# EAGLE board rpd_pcb (EAGLE 9.7.0)
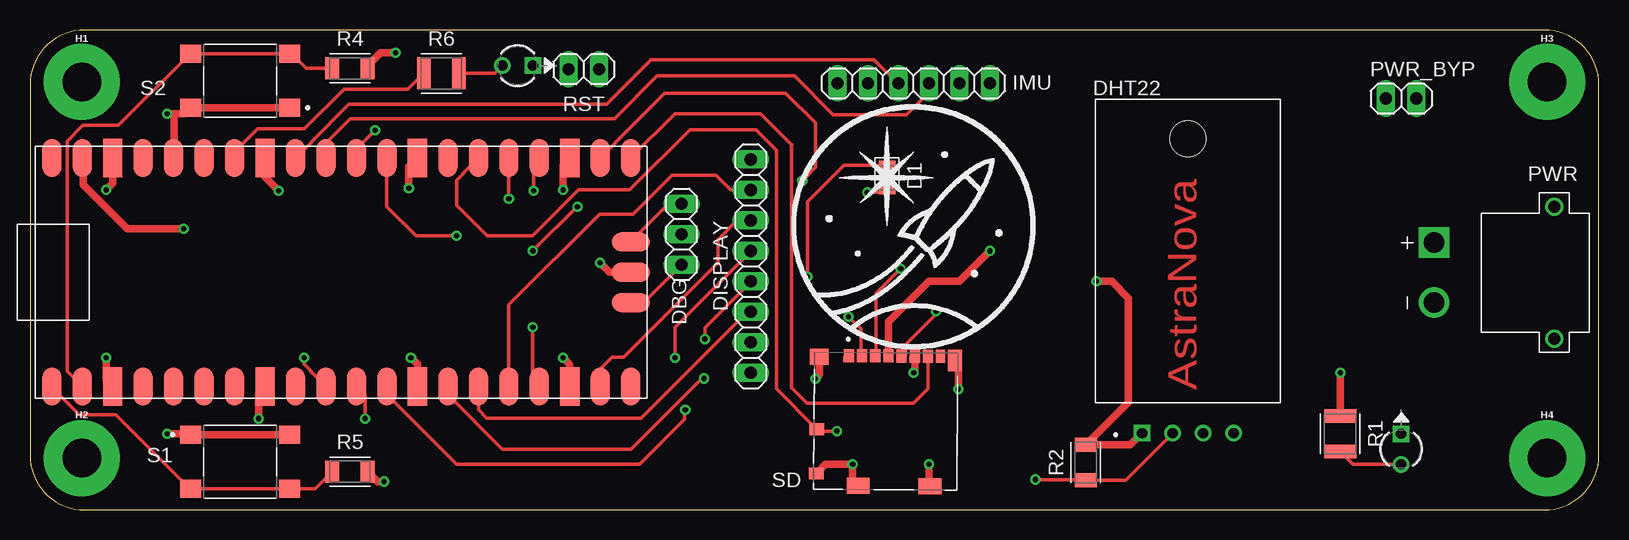
[diagram p0: board, top side]
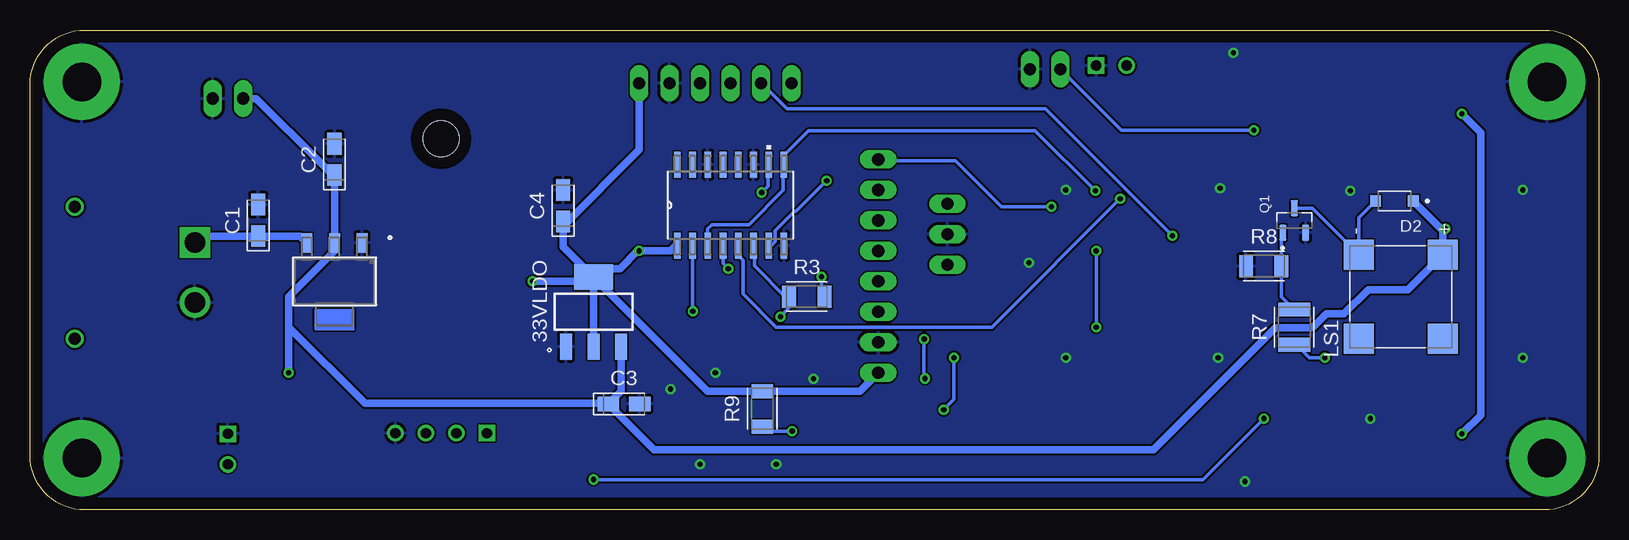
[diagram p1: board, bottom side, seen from below]

Size 130.79 x 40 mm. Coordinates in mm from the lower left corner, seen from the top.
Outline: 130.79,4.57 130.79,35.43 arc90 126.22,40 4.57,40 arc90 0,35.43 0,4.57 arc90 4.57,0 126.22,0 arc90 130.79,4.57
Copper layers (1*16): Top 0.035mm / dielectric 1.5mm / Bottom 0.035mm
Design rules "default.dru": minimum track width 12mil, minimum drill 17mil, track to track 6mil, track to pad 12mil, pad to pad 12mil, via to via 12mil, smd to smd 12mil, copper to edge 40mil, drill to drill 15mil, minimum pad ring 10mil, minimum via ring 8mil, stop-mask expansion 4mil, vias tented up to drill 9999mil, thermal gap 10mil
Net classes: 1 Power: width 0.635 mm

## Footprints (pad centres in the part's own frame; a part is rotated, then mirrored left to right if it is on the bottom)
SOT-223_STM = smd 0.914 x 1.6: 1 -2.3,-3.2; 2 0,-3.2; 3 2.3,-3.2
SOT230P700X180-4N = smd 2.15 x 1: 1 -2.9,2.3; 2 -2.9,0; 3 -2.9,-2.3 | smd 2.15 x 3.25: 4 2.9,0
CAPMP3216X180N = smd 1.796 x 1.189: 1 -1.31,0; 2 1.31,0
TLL_SERIES_VIS = drill 0.864 pad 1.372 square: 1 0,0 | drill 0.864 pad 1.372: 2 2.54,0
LEDC2012X110N_FLAT-R = smd 0.762 x 1.362: A 1.025,0; C -1.025,0
DIO_SD101BW_RH = smd 0.9 x 0.95: A 1.575,0; C -1.575,0
1X03 = drill 1.016 long: 1 -2.54,0; 2 0,0; 3 2.54,0
XDCR_DHT22 = drill 0.86 pad 1.29 square: 1 -3.81,-15.19 | drill 0.86 pad 1.29: 2 -1.27,-15.19; 3 1.27,-15.19; 4 3.81,-15.19 | hole 3: 0,9.35
1X08 = drill 1.016 long: 1 -8.89,0; 2 -6.35,0; 3 -3.81,0; 4 -1.27,0; 5 1.27,0; 6 3.81,0; 7 6.35,0; 8 8.89,0
STANDOFF-ELECTRICAL = drill 3.2 pad 6.35: P1 0,0
1X06 = drill 1.016 long: 1 -6.35,0; 2 -3.81,0; 3 -1.27,0; 4 1.27,0; 5 3.81,0; 6 6.35,0
CUI_CMT-8540S-SMT = smd 2.5 x 2.5: 1 -3.5,3.5; 2 -3.5,-3.5; N 3.5,3.5; P 3.5,-3.5
RPI_PICO = smd 3.2 x 1.6: 3V3 9.525,13.97; 3V3_EN 9.525,16.51; ADC_VREF 9.525,11.43; AGND 9.525,6.35; GND@1 -9.525,19.05; GND@2 -9.525,6.35; GND@3 -9.525,-6.35; GND@4 -9.525,-19.05; GND@6 9.525,-19.05; GND@7 9.525,-6.35; GND@8 9.525,19.05; GP0 -9.525,24.13; GP1 -9.525,21.59; GP2 -9.525,16.51; GP3 -9.525,13.97; GP4 -9.525,11.43; GP5 -9.525,8.89; GP6 -9.525,3.81; GP7 -9.525,1.27; GP8 -9.525,-1.27; GP9 -9.525,-3.81; GP10 -9.525,-8.89; GP11 -9.525,-11.43; GP12 -9.525,-13.97; GP13 -9.525,-16.51; GP14 -9.525,-21.59; GP15 -9.525,-24.13; GP16 9.525,-24.13; GP17 9.525,-21.59; GP18 9.525,-16.51; GP19 9.525,-13.97; GP20 9.525,-11.43; GP21 9.525,-8.89; GP22 9.525,-3.81; GP26_A0 9.525,1.27; GP27_A1 9.525,3.81; GP28_A2 9.525,8.89; RUN 9.525,-1.27; VBUS 9.525,24.13; VSYS 9.525,21.59 | smd 1.6 x 3.2: GND@5 0,-24.13; SWCLK -2.54,-24.13; SWDIO 2.54,-24.13
AMASS_XT30PW-M = drill 1.7: N 2.5,-10 | drill 1.7 square: P -2.5,-10 | drill 1: S1 5.5,0; S2 -5.5,0
1X02 = drill 1.016 long: 1 -1.27,0; 2 1.27,0
SOT95P237X112-3N = smd 1.3 x 0.59: 1 -1.025,0.95; 2 -1.025,-0.95; 3 1.025,0
RESC3224X71 = smd 1.131 x 2.66: 1 -1.47,0; 2 1.47,0
RESC3216X70 = smd 1.165 x 1.815: 1 -1.475,0; 2 1.475,0
SW_TS05-66-50-BK-260-SMT-67 = smd 1.75 x 1.5: 1 -4.125,2.25; 2 -4.125,-2.25; 3 4.125,2.25; 4 4.125,-2.25
MOLEX_104031-0811 = smd 0.85 x 1.1: 1 3.105,-5.45; 2 2.005,-5.45; 3 0.905,-5.45; 4 -0.195,-5.45; 5 -1.295,-5.45; 6 -2.395,-5.45; 7 -3.495,-5.45 | smd 0.75 x 1.1: 8 -4.545,-5.45 | smd 1.2 x 1: 9 5.74,0.7; 10 5.74,4.4 | smd 1.55 x 1.35: G1 5.565,-5.325 | smd 1.17 x 1.8: G2 -5.755,-5.1 | smd 1.9 x 1.35: G3 -3.73,5.375; G4 2.24,5.375
NS16 = smd 2.159 x 0.559: 1 -3.378,4.445; 2 -3.378,3.175; 3 -3.378,1.905; 4 -3.378,0.635; 5 -3.378,-0.635; 6 -3.378,-1.905; 7 -3.378,-3.175; 8 -3.378,-4.445; 9 3.378,-4.445; 10 3.378,-3.175; 11 3.378,-1.905; 12 3.378,-0.635; 13 3.378,0.635; 14 3.378,1.905; 15 3.378,3.175; 16 3.378,4.445

## Placement (x,y rotation side)
5VLDO  LD1117S50TRSOT-223_STM  [SOT-223_STM]  105.41,19.05 180 bottom
33VLDO  LD1117S33TR  [SOT230P700X180-4N]  83.82,16.51 90 bottom
C1  0.1uF  [CAPMP3216X180N]  111.76,24.13 90 bottom
C2  10uF  [CAPMP3216X180N]  105.41,29.21 90 bottom
C3  0.1uF  [CAPMP3216X180N]  81.28,8.84 0 bottom
C4  10uF  [CAPMP3216X180N]  86.36,25.35 90 bottom
CR1  TLLG4400TLL_SERIES_VIS  [TLL_SERIES_VIS]  114.3,6.35 270 top
CR2  TLLR4401TLL_SERIES_VIS  [TLL_SERIES_VIS]  41.91,37.03 180 top
D1  LED_RED  [LEDC2012X110N_FLAT-R]  71.45,27.7 270 top
D2  SD101BW_RH  [DIO_SD101BW_RH]  17.06,25.74 180 bottom
DBG  PINHD-1X3  [1X03]  54.31,22.98 90 top
DHT22  DHT22  [XDCR_DHT22]  96.52,21.59 0 top
DISPLAY  PINHD-1X8  [1X08]  60.08,20.32 90 top
H1  STANDOFF_ELECTRICAL  [STANDOFF-ELECTRICAL]  4.32,35.68 0 top
H2  STANDOFF_ELECTRICAL  [STANDOFF-ELECTRICAL]  4.32,4.32 0 top
H3  STANDOFF_ELECTRICAL  [STANDOFF-ELECTRICAL]  126.47,35.68 0 top
H4  STANDOFF_ELECTRICAL  [STANDOFF-ELECTRICAL]  126.47,4.32 0 top
IMU  PINHD-1X6  [1X06]  73.66,35.56 180 top
LS1  CMT-8540S-SMT  [CUI_CMT-8540S-SMT]  16.51,17.78 90 bottom
MCU  [RPI_PICO]  25.95,19.81 90 top
PWR  XT30PW-M  [AMASS_XT30PW-M]  127.05,19.78 270 top
PWR_BYP  PINHD-1X2  [1X02]  114.3,34.29 0 top
Q1  IRLML2502  [SOT95P237X112-3N]  25.4,24.13 90 bottom
R1  270  [RESC3224X71]  109.22,6.35 270 top
R2  10K  [RESC3216X70]  88.01,3.96 90 top
R3  1K  [RESC3216X70]  66.04,17.78 0 bottom
R4  10K  [RESC3216X70]  26.67,36.81 0 top
R5  10K  [RESC3216X70]  26.67,3.19 0 top
R6  680  [RESC3224X71]  34.29,36.38 0 top
R7  270  [RESC3224X71]  25.4,15.24 90 bottom
R8  10K  [RESC3216X70]  27.94,20.32 0 bottom
R9  10K  [RESC3216X70]  69.75,8.43 90 bottom
RST  PINHD-1X2  [1X02]  46.17,36.73 0 top
S1  TS05-66-50-BK-260-SMT-67  [SW_TS05-66-50-BK-260-SMT-67]  17.53,4.02 0 top
S2  TS05-66-50-BK-260-SMT-67  [SW_TS05-66-50-BK-260-SMT-67]  17.53,35.77 180 top
SD  104031-0811  [MOLEX_104031-0811]  71.32,7.4 179.6 top
SR  CD74HC4050NSRNS16  [NS16]  72.39,25.4 90 bottom

## Library data of the parts
5VLDO = ukseds electronics; COPYRIGHT: Copyright (C) 2026 Ultra Librarian. All rights reserved.; DATASHEET: https://www.st.com/resource/en/datasheet/ld1117.pdf; DESCRIPTION: Adjustable and fixed low drop positive voltage regulator; MANUFACTURER_NAME: STMicroelectronics; MANUFACTURER_PART_NUMBER: LD1117S50TR
33VLDO = ukseds electronics; MANUFACTURER: ST Microelectronics
C1-C4 = Capacitor; CATEGORY: Capacitor; PACKAGE_SIZE: 1206; PACKAGE_TYPE: Surface Mount; SUBCATEGORY: Tantalum Capacitors; TYPE: Polymer Capacitors
CR1 = ukseds electronics; COPYRIGHT: Copyright (C) 2026 Ultra Librarian. All rights reserved.; DATASHEET: https://www.vishay.com/doc?83029; DESCRIPTION: GREEN LED; MANUFACTURER_NAME: Vishay; MANUFACTURER_PART_NUMBER: TLLG4400
CR2 = ukseds electronics; COPYRIGHT: Copyright (C) 2026 Ultra Librarian. All rights reserved.; DATASHEET: https://www.vishay.com/doc?83029; DESCRIPTION: 3MM LED RED LC TINT. DIFF-e3; MANUFACTURER_NAME: Vishay; MANUFACTURER_PART_NUMBER: TLLR4401
D1 = LED; CATEGORY: LED; COLOR: Red; DESCRIPTION: Red LED Indication 0805 (2012 Metric); PACKAGE_SIZE: 0805; PACKAGE_TYPE: Surface Mount; SUBCATEGORY: Chip LED; TYPE: Square with Flat Top
D2 = ukseds electronics; AVAILABILITY: In Stock; DESCRIPTION: 0.25A, 100V, Schottky Rectifier; MF: Taiwan Semiconductor; MP: BAT46GW RHG; PACKAGE: SOD-123-2 Taiwan Semiconductor; PRICE: None
DBG = Connector; CATEGORY: Headers; DESCRIPTION: Header-Straight-3 Position; PACKAGE_TYPE: THT; PITCH: 0.100" (2.54mm); SUBCATEGORY: Headers-Male Pins; TYPE: Board to Board or Cable-Unshrouded-Through Hole-Straight
DHT22 = ukseds electronics; CREATOR: KARTHIK; MANUFACTURER: Aosong Electronics; MAXIMUM_PACKAGE_HEIGHT: 7.8 mm; STANDARD: IPC-7351B
DISPLAY = Connector; CATEGORY: Connectors; DESCRIPTION: Header-Straight-8 Position; PACKAGE_TYPE: Through Hole; PITCH: 0.100" (2.54mm); SUBCATEGORY: Headers; TYPE: Male Pins
H1-H4 = SparkFun-Hardware
IMU = Connector; CATEGORY: Connectors; DESCRIPTION: Header-Straight-6 Position; PACKAGE_TYPE: Through Hole; PITCH: 0.100" (2.54mm); SUBCATEGORY: Headers; TYPE: Male Pins
LS1 = ukseds electronics; AVAILABILITY: Unavailable; DESCRIPTION: 8.5 mm, 5.0 Vo-p, 100 dB, Surface Mount _SMT_, Magnetic Audio Transducer Buzzer; MF: CUI; MP: CMT-8540S-SMT; PACKAGE: None; PRICE: None
MCU = ukseds electronics
PWR = ukseds electronics; MANUFACTURER: Amass; MAXIMUM_PACKAGE_HEIGHT: 5 mm; PARTREV: 1.2; SNAPEDA_PN: XT30PW-M; STANDARD: Manufacturer Recommendations
PWR_BYP RST = Connector; CATEGORY: Headers; DESCRIPTION: Header-Straight-2 Position; PACKAGE_TYPE: THT; PITCH: 0.100" (2.54mm); SUBCATEGORY: Headers-Male Pins; TYPE: Board to Board or Cable-Unshrouded-Through Hole-Straight
Q1 = ukseds electronics; MANUFACTURER: Infineon Technologies; MAXIMUM_PACKAGE_HEIGHT: 1.12 mm; PARTREV: April 24, 2014; SNAPEDA_PACKAGE_ID: 11907; SNAPEDA_PN: IRLML2502; STANDARD: IPC 7351B
R1 R6 R7 = Resistor; CATEGORY: Resistors; DESCRIPTION: Chip Resistor 3.20 X 2.49 X 0.71 mm body 1210(3225-METRIC) Package; PACKAGE_SIZE: 1210; PACKAGE_TYPE: Surface Mount
R2-R5 R8 R9 = Resistor; CATEGORY: Resistors; DESCRIPTION: Chip Resistor 3.20 X 1.60 X 0.70 mm body 1206(3216-METRIC) Package; PACKAGE_SIZE: 1206; PACKAGE_TYPE: Surface Mount
S1 S2 = ukseds electronics; MANUFACTURER: CUI Devices; PARTREV: 1.0; STANDARD: Manufacturer Recommendations
SD = ukseds electronics; MANUFACTURER: Molex; MAXIMUM_PACKAGE_HEIGHT: 1.57mm; PARTREV: B2; STANDARD: Manufacturer Recommendations
SR = ukseds electronics; COPYRIGHT: Copyright (C) 2026 Ultra Librarian. All rights reserved.; DATASHEET: https://www.ti.com/lit/gpn/cd74hc4050; DESCRIPTION: 6-ch, 2-V to 6-V buffers 16-SOP -55 to 125; MANUFACTURER_NAME: Texas Instruments; MANUFACTURER_PART_NUMBER: CD74HC4050NSR

## Nets
1Y: SD.5 SR.2
2Y: SD.3 SR.4
3Y: R3.1 SD.2 SR.6
4Y: D1.A SR.10
5Y: SR.12
6Y: SR.15
+3.3V [Power]: 33VLDO.2 33VLDO.4 C4.1 DHT22.1 DISPLAY.1 IMU.1 R2.2 R9.2 SD.4 SR.1
+5V [Power]: 5VLDO.2 33VLDO.3 C2.1 C3.1 D2.C LS1.P MCU.VSYS PWR_BYP.1 R1.1
BTN1: MCU.GP0 R5.1 S1.2 S1.4
BTN2: MCU.GP1 R4.1 S2.2 S2.4
BUZZER: MCU.GP7 R7.1
DHT22_DATA: DHT22.2 MCU.GP8 R2.1
DSP_BUSY: DISPLAY.8 MCU.GP13
DSP_CLK: DISPLAY.4 MCU.GP10
DSP_CS: DISPLAY.5 MCU.GP9
DSP_DC: DISPLAY.6 MCU.GP14
DSP_DIN: DISPLAY.3 MCU.GP11
DSP_RST: DISPLAY.7 MCU.GP12
GND [Power]: 5VLDO.1 33VLDO.1 C1.2 C2.2 C3.2 C4.2 CR1.1 CR2.1 DBG.2 DHT22.4 DISPLAY.2 H1.P1 H2.P1 H3.P1 H4.P1 IMU.2 MCU.AGND MCU.GND@1 MCU.GND@2 MCU.GND@3 MCU.GND@4 MCU.GND@5 MCU.GND@6 MCU.GND@7 MCU.GND@8 PWR.N PWR_BYP.2 Q1.2 R4.2 R5.2 R8.1 RST.2 SD.6 SD.10 SD.G1 SD.G2 SD.G3 SD.G4 SR.8 SR.11 SR.14
IMU_FSYNC: IMU.6
IMU_INT: IMU.5 MCU.GP22
IMU_SCL: IMU.4 MCU.GP27_A1
IMU_SDA: IMU.3 MCU.GP26_A0
N$1: CR2.2 R6.2
N$2: CR1.2 R1.2
N$3: D2.A LS1.N Q1.3
N$4: Q1.1 R7.2 R8.2
N$7: D1.C R3.2
RUN: MCU.RUN RST.1
SD_CD: MCU.GP20 R9.1 SD.9
SD_CLK: MCU.GP18 SR.3 SR.9
SD_CS: MCU.GP17 SR.7
SD_DI: MCU.GP19 SR.5
SD_DO: MCU.GP16 SD.7
STAT_LED: MCU.GP28_A2 R6.1
SWCLK: DBG.1 MCU.SWCLK
SWDIO: DBG.3 MCU.SWDIO
VCC [Power]: 5VLDO.3 C1.1 PWR.P
VDD [Power]: MCU.3V3 S1.1 S1.3 S2.1 S2.3

## Tracks (layer width: path | path; a pad name or v marks a point on that pad's centre or on a via)
1Y  (via drill 0.43)
  Top 0.305: v75.54,16.55 75.54,16.33 72.69,13.49 72.69,12.92 SD.5
  Bottom 0.305: v75.54,16.55 75.55,16.57 75.55,21.95 SR.2
2Y  (via drill 0.43)
  Top 0.305: v72.58,20.12 70.52,18.06 70.52,12.92 SD.3
  Bottom 0.305: v72.58,20.12 73.04,20.57 73.04,21.95 SR.4
3Y  (via drill 0.43)
  Top 0.305: v68.24,16.12 69.27,15.09 69.27,12.92 SD.2
  Bottom 0.305: v68.24,16.12 67.55,16.8 67.55,17.72 R3.1 67.67,17.6 70.41,20.34 70.41,21.95 SR.6
4Y  (via drill 0.43)
  Top 0.305: v69.79,26.46 71.23,26.46 D1.A
  Bottom 0.305: v69.79,26.46 69.27,26.99 69.27,28.69 SR.10
+3.3V  (via drill 0.43)
  Top 0.635: SD.4 71.55,12.92 71.55,15.67 74.93,19.05 77.47,19.05 v80.01,21.59 | DHT22.1 91.75,5.44 R2.2 91.56,8.98 91.56,17.66 90.17,19.05 v88.9,19.05
  Bottom 0.635: 33VLDO.4 33VLDO.2 | C4.1 86.36,23.66 | 86.36,23.66 86.36,21.95 33VLDO.4 | SR.1 76.92,22.06 77.39,21.59 v80.01,21.59 80.14,21.59 81.61,20.12 83.55,20.12 33VLDO.4 | v88.9,19.05 84.18,19.05 33VLDO.4 | IMU.1 80.01,30.01 86.36,23.66 | 33VLDO.4 74.31,9.9 R9.2 61.61,9.9 DISPLAY.1
+5V  (via drill 0.43)
  Top 0.635: v109.22,11.43 R1.1 | 4.46,27.94 4.46,27.09 8.12,23.43 v12.8,23.43 | 4.46,27.94 4.46,29.26 | 4.46,27.94 4.36,28.04 MCU.VSYS
  Bottom 0.635: D2.C 13.01,23.27 | 13.01,23.27 LS1.P 15.93,18.36 19.24,18.36 21.26,16.34 22.75,16.34 23.89,15.2 26.98,15.2 37.15,5.03 78.78,5.03 C3.1 | v109.22,11.43 109.22,15.24 | 109.22,15.24 109.22,17.78 105.41,21.59 105.39,21.83 105.39,21.95 5VLDO.2 C2.1 105.34,27.83 105.34,27.7 106.56,28.92 106.56,28.93 111.92,34.29 PWR_BYP.1 | 109.22,15.24 102.87,8.89 82.64,8.89 C3.1 | v12.8,23.43 13.01,23.27 | C3.1 81.52,9.91 33VLDO.3
BTN1
  Top 0.305: R5.1 23.77,1.77 S1.4 S1.2 13.26,1.83 7.14,7.95 4.11,7.95 1.82,10.25 MCU.GP0
BTN2
  Top 0.305: S2.2 21.66,38.03 | 21.66,38.03 21.74,38.1 23.03,36.81 R4.1 | 21.66,38.03 13.41,38.03 S2.4 13.26,37.95 7.36,32.05 4.39,32.05 3.09,30.75 3.09,15.24 3.09,11.56 MCU.GP1
BUZZER  (via drill 0.43)
  Top 0.305: MCU.GP7 23.39,11.57 23.39,11.61 22.86,12.14 v22.86,12.7
  Bottom 0.305: 25.38,13.72 R7.1 25.2,13.77 24.13,12.7 v22.86,12.7
DHT22_DATA  (via drill 0.43)
  Top 0.305: v27.94,7.62 27.94,9.56 MCU.GP8 | DHT22.2 91.34,2.49 R2.1 87.96,2.54 v83.82,2.54
  Bottom 0.305: v83.82,2.54 33.02,2.54 v27.94,7.62
DSP_BUSY  (via drill 0.43)
  Top 0.305: v41.91,15.24 41.91,10.83 MCU.GP13 | v41.91,21.59 45.6,25.28 v45.63,25.28
  Bottom 0.305: v41.91,21.59 v41.91,15.24 | v45.63,25.28 49.79,25.28 53.63,29.12 59.99,29.12 DISPLAY.8
DSP_CLK  (via drill 0.43)
  Top 0.305: MCU.GP10 34.84,9.61 39.37,5.08 50.12,5.08 55.99,10.96 v56.18,10.96 | DISPLAY.4 60.08,19 56.25,15.17 v56.25,14.25
  Bottom 0.305: v56.25,14.25 56.25,11.03 v56.18,10.96
DSP_CS  (via drill 0.43)
  Top 0.305: MCU.GP9 29.76,9.61 35.56,3.81 50.82,3.81 54.57,7.56 54.57,8.29 v54.63,8.35 | v53.77,12.7 53.77,15.22 60.08,21.54 DISPLAY.5
  Bottom 0.305: v53.77,12.7 53.77,9.21 v54.63,8.35 | v54.63,8.35
DSP_DC
  Top 0.305: DISPLAY.6 58.94,24.13 57.35,22.54 57.35,20.61 49.47,12.73 48.53,12.73 47.54,11.74 MCU.GP14
DSP_DIN
  Top 0.305: DISPLAY.3 59.8,16.51 50.95,7.67 38.05,7.67 37.38,8.34 MCU.GP11
DSP_RST
  Top 0.305: MCU.GP12 39.92,17.09 47.46,24.63 50.28,24.63 53.52,27.88 57.2,27.88 58.41,26.67 DISPLAY.7
GND  (via drill 0.43)
  Top 0.635: v30.48,38.1 29.21,38.1 28.14,37.03 R4.2 | SD.G4 68.58,2.5 v68.58,3.81 66.32,3.81 SD.10 | SD.G3 74.93,2.08 v74.93,3.81 | 73.72,12.92 SD.6 73.75,11.53 v73.66,11.43 | 76.92,12.69 SD.G2 77.39,12.18 v77.39,10.08 | 19.55,10.63 19.55,10.29 MCU.GND@2 19.05,9.74 v19.05,7.62 | SD.G1 | R5.2 28.96,2.38 v29.52,2.38 | MCU.GND@4 45,12.15 v44.45,12.7 | MCU.GND@3 32.3,12.15 v31.75,12.7 | v44.45,26.67 44.45,28.79 MCU.GND@6 | MCU.GND@8 6.9,27.22 v6.35,26.67 | MCU.GND@1 6.35,10.83 v6.35,12.7 | MCU.AGND 19.6,27.73 v20.72,26.6 | MCU.GND@7 31.58,28.62 v31.58,26.82 | MCU.GND@5 48.31,19.81 v47.53,20.6 | SD.G1 65.8,11.27 v65.47,10.94
  pour Bottom (rank 6): -7.54,-6.27 152.32,-6.27 152.32,43.1 -7.54,43.1
IMU_INT  (via drill 0.43)
  Top 0.305: v35.56,22.86 32.17,22.86 29.75,25.28 29.75,29.33 MCU.GP22
  Bottom 0.305: v35.56,22.86 46.15,33.45 67.68,33.45 69.8,35.56 IMU.5
IMU_SCL
  Top 0.305: 72.35,35.55 IMU.4 72.34,35.56 70.36,37.54 51.76,37.54 48.04,33.82 26.58,33.82 23.42,30.66 23.42,30.62 MCU.GP27_A1
IMU_SDA
  Top 0.305: 74.87,35.66 IMU.3 74.93,34.8 73.08,32.95 66.95,32.95 63.73,36.17 52.28,36.17 48.73,32.62 26.69,32.62 24.68,30.61 MCU.GP26_A0
N$1
  Top 0.305: CR2.2 38.73,36.38 R6.2
N$2
  Top 0.305: CR1.2 110.29,3.81 R1.2
N$3
  Bottom 0.305: D2.A 20.01,24.36 LS1.N 23.89,25.16 Q1.3
N$4
  Bottom 0.305: Q1.1 26.46,22.99 R8.2 26.46,17.77 R7.2
N$7  (via drill 0.43)
  Top 0.305: D1.C 67.85,28.73 64.81,25.68 v64.81,19.43
  Bottom 0.305: v64.81,19.43 64.81,18.06 64.58,17.83 R3.2
RUN  (via drill 0.43)
  Top 0.305: MCU.RUN 27.22,30.11 v28.77,31.66
  Bottom 0.305: v28.77,31.66 39.82,31.66 RST.1
SD_CD  (via drill 0.43)
  Top 0.305: MCU.GP20 36.09,28.05 36.09,28.02 35.56,27.48 35.56,25.4 38.1,22.86 41.91,22.86 45.72,26.67 49.99,26.67 55.02,31.7 60.5,31.7 62.23,29.97 62.23,10.09 SD.9 65.74,6.58 v67.25,6.58
  Bottom 0.305: R9.1 69.37,6.58 v67.25,6.58
SD_CLK  (via drill 0.43)
  Top 0.305: MCU.GP18 41.98,28.87 v41.98,26.61
  Bottom 0.305: SR.3 74.3,23.43 73.95,23.77 70.87,23.77 68.01,26.63 68.01,28.69 SR.9 | 67.89,28.92 SR.9 | SR.9 67.94,29.58 65.9,31.62 47,31.62 v41.98,26.61
SD_CS  (via drill 0.43)
  Top 0.305: 47.54,29.3 MCU.GP17 48.82,30.62 48.82,30.66 52.91,34.75 62.99,34.75 65.48,32.26 65.48,28.55 v64.38,27.44
  Bottom 0.305: 69.15,21.95 SR.7 69.22,21.82 68.68,22.35 68.68,23.29 67.07,24.9 66.92,24.9 v64.38,27.44
SD_DI  (via drill 0.43)
  Top 0.305: v39.92,25.94 MCU.GP19
  Bottom 0.305: 71.67,21.95 SR.5 71.75,21.22 71.36,20.83 71.36,18 68.6,15.24 50.61,15.24 v39.92,25.94
SD_DO
  Top 0.305: 74.75,12.8 SD.7 74.86,10.09 73.66,8.89 64.77,8.89 63.47,10.19 63.47,30.45 | MCU.GP16 53.76,33.02 60.91,33.02 63.47,30.45 | 63.5,30.43 63.47,30.45
STAT_LED
  Top 0.305: 32.79,36.35 R6.1 31.5,35.06 30.48,35.06 26.17,35.06 22.86,31.75 18.96,31.75 17.06,29.84 MCU.GP28_A2
SWCLK
  Top 0.305: DBG.1 51.14,17.27 MCU.SWCLK
SWDIO
  Top 0.305: MCU.SWDIO 53.24,25.52 DBG.3
VCC
  Bottom 0.635: 5VLDO.3 108.28,22.82 C1.1 116.51,22.82 PWR.P
VDD  (via drill 0.43)
  Top 0.635: S2.1 S2.3 12.91,33.02 12,33.02 | S1.3 S1.1 13.32,6.35 v11.43,6.35 | v11.43,33.02 12,33.02 | 12,33.02 12,29.38 MCU.3V3
  Bottom 0.635: v11.43,6.35 9.87,7.91 9.87,31.46 v11.43,33.02

## Text on the board
Top: AstraNova
bStop: CL | AA | CH | AD | TZ | AM | LW | RP | JS
200bmp: C:/Users/clewi/Downloads/logo copy.bmp